# Altium PCB triumvi_v10_mcu.PcbDoc
Units mil, origin at the board's own origin, x right, y up, seen from the top; angles counter-clockwise.
Board outline 1100 x 1020 mil, 6 copper layers (Top Layer, GND, VCC, Signal Layer 2, GND (Mid4), Bottom Layer), stack 36 mil thick; 66 components, 63 nets, 311 pads, 142 vias.
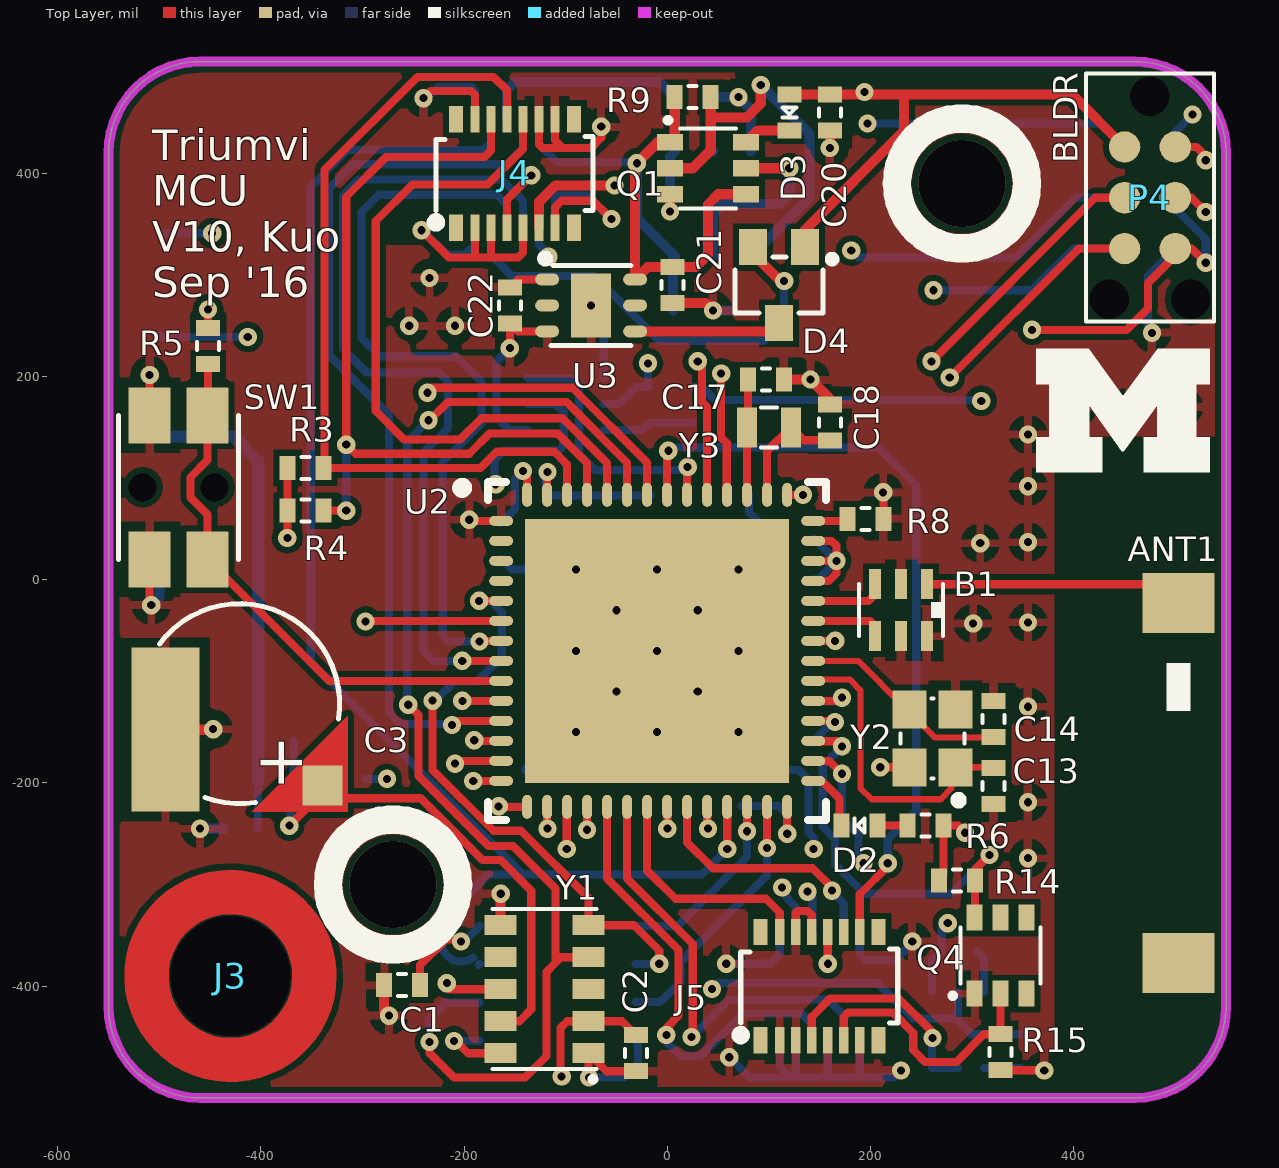
[diagram p0: Top Layer view]
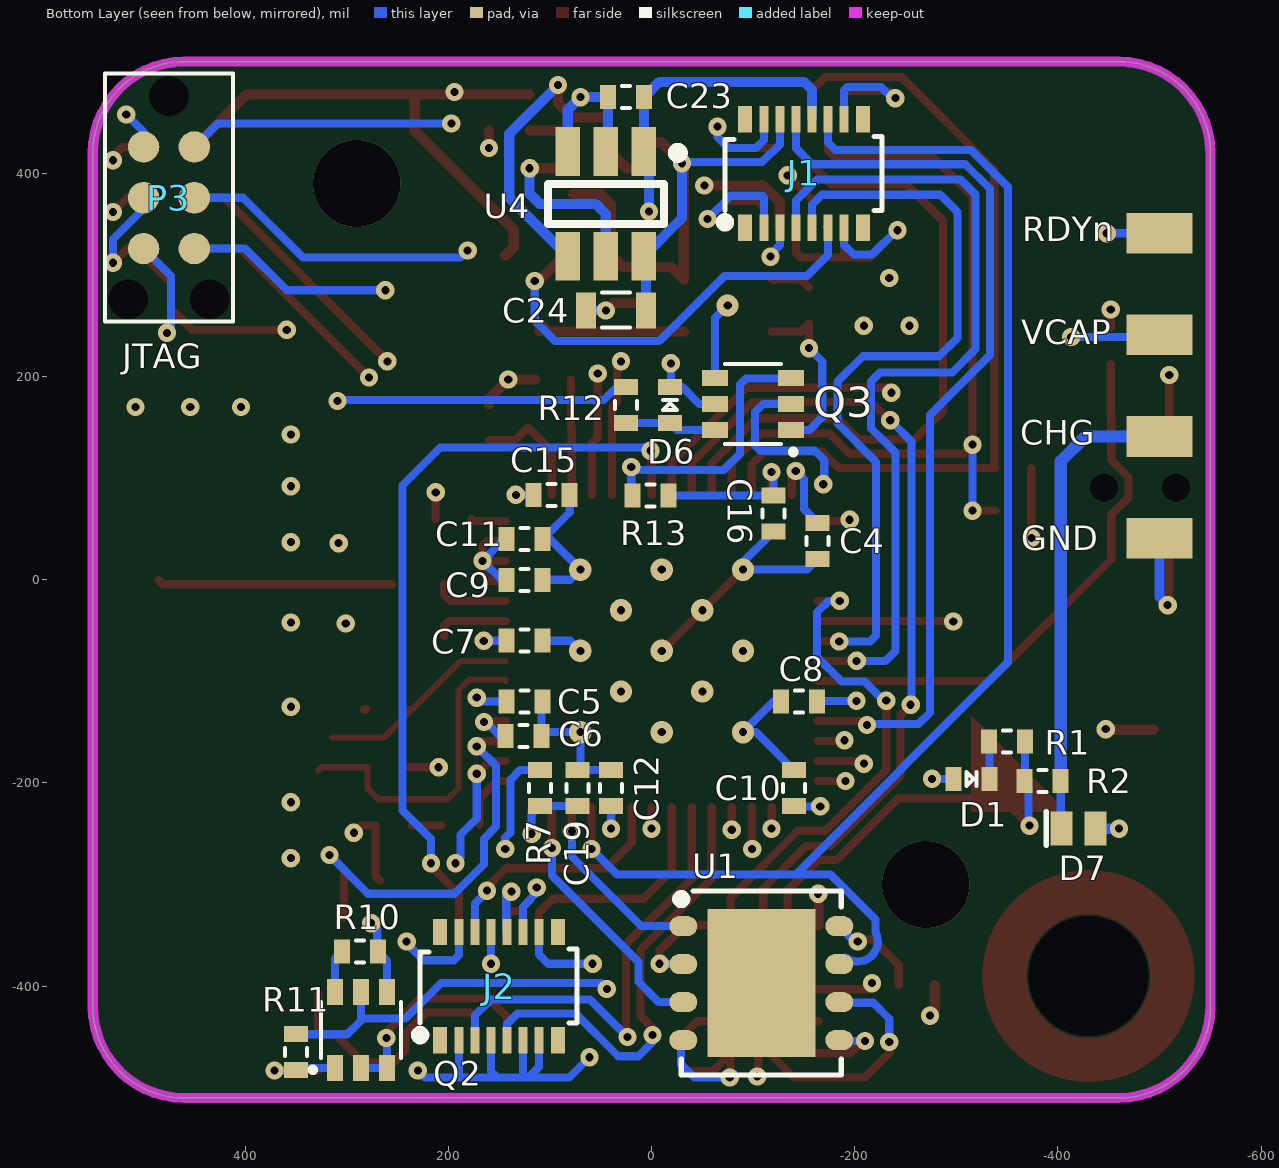
[diagram p1: Bottom Layer view, seen from below]
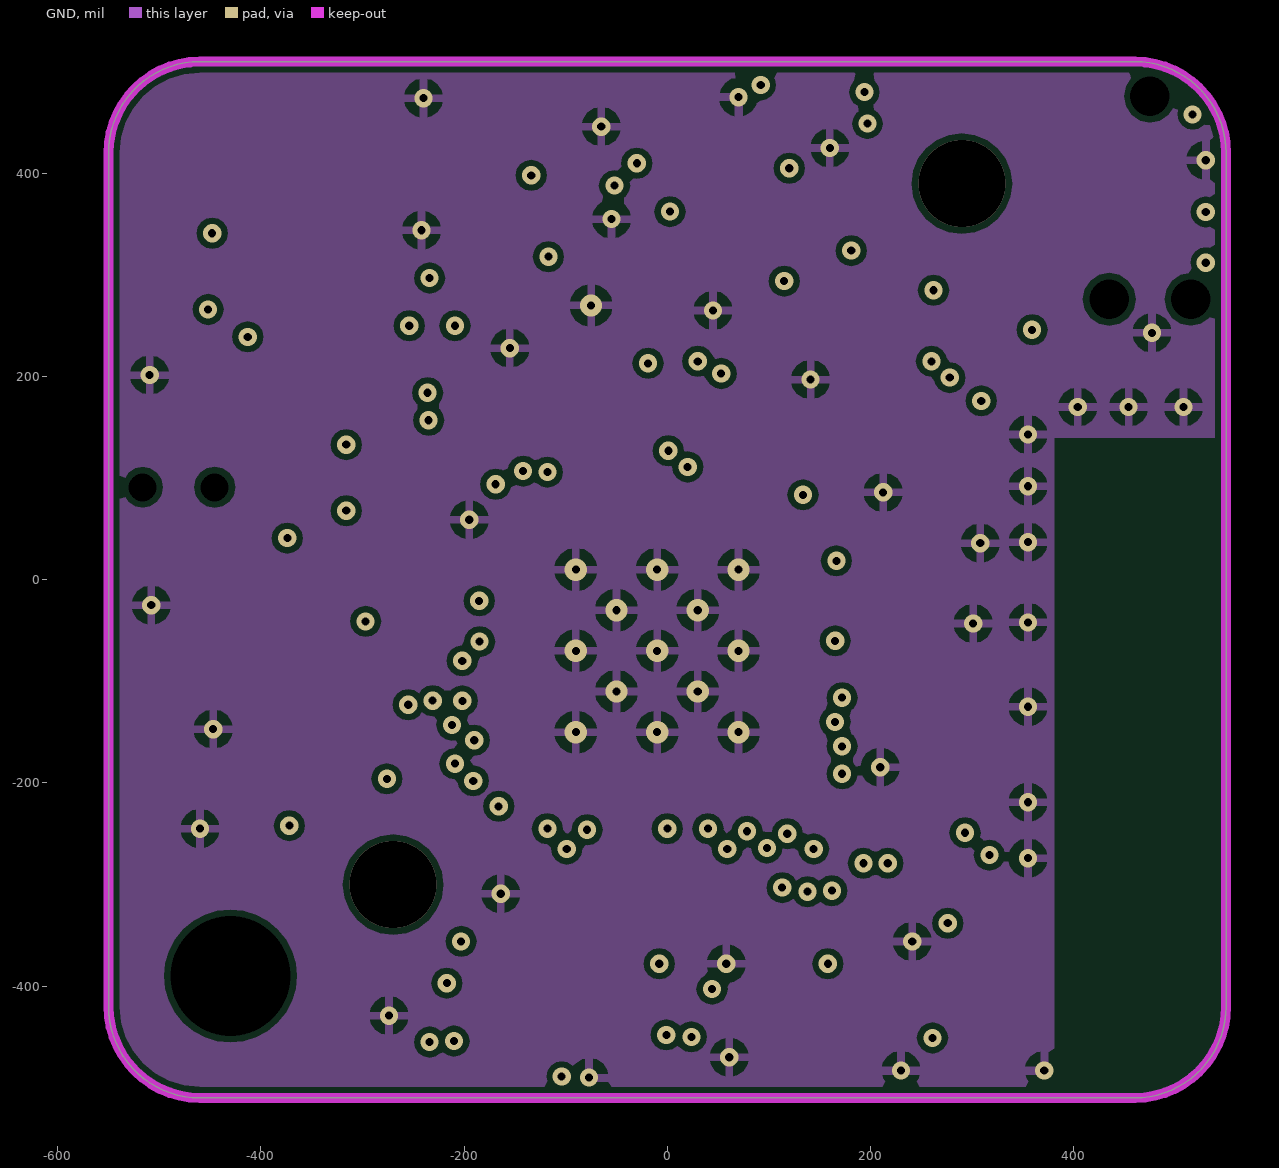
[diagram p2: GND]
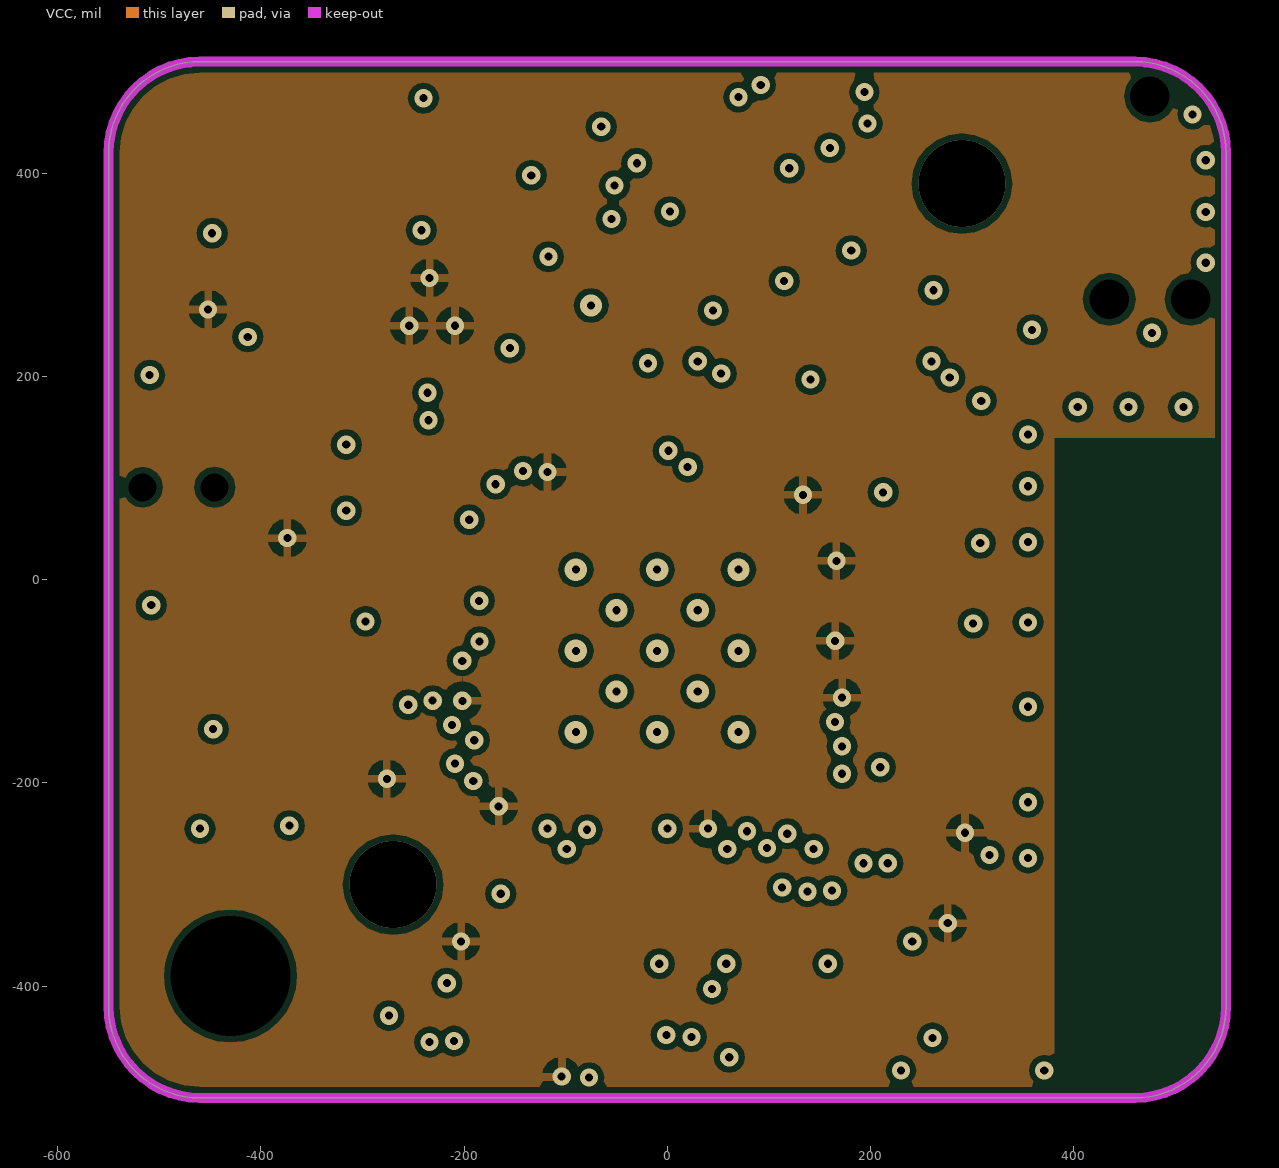
[diagram p3: VCC]
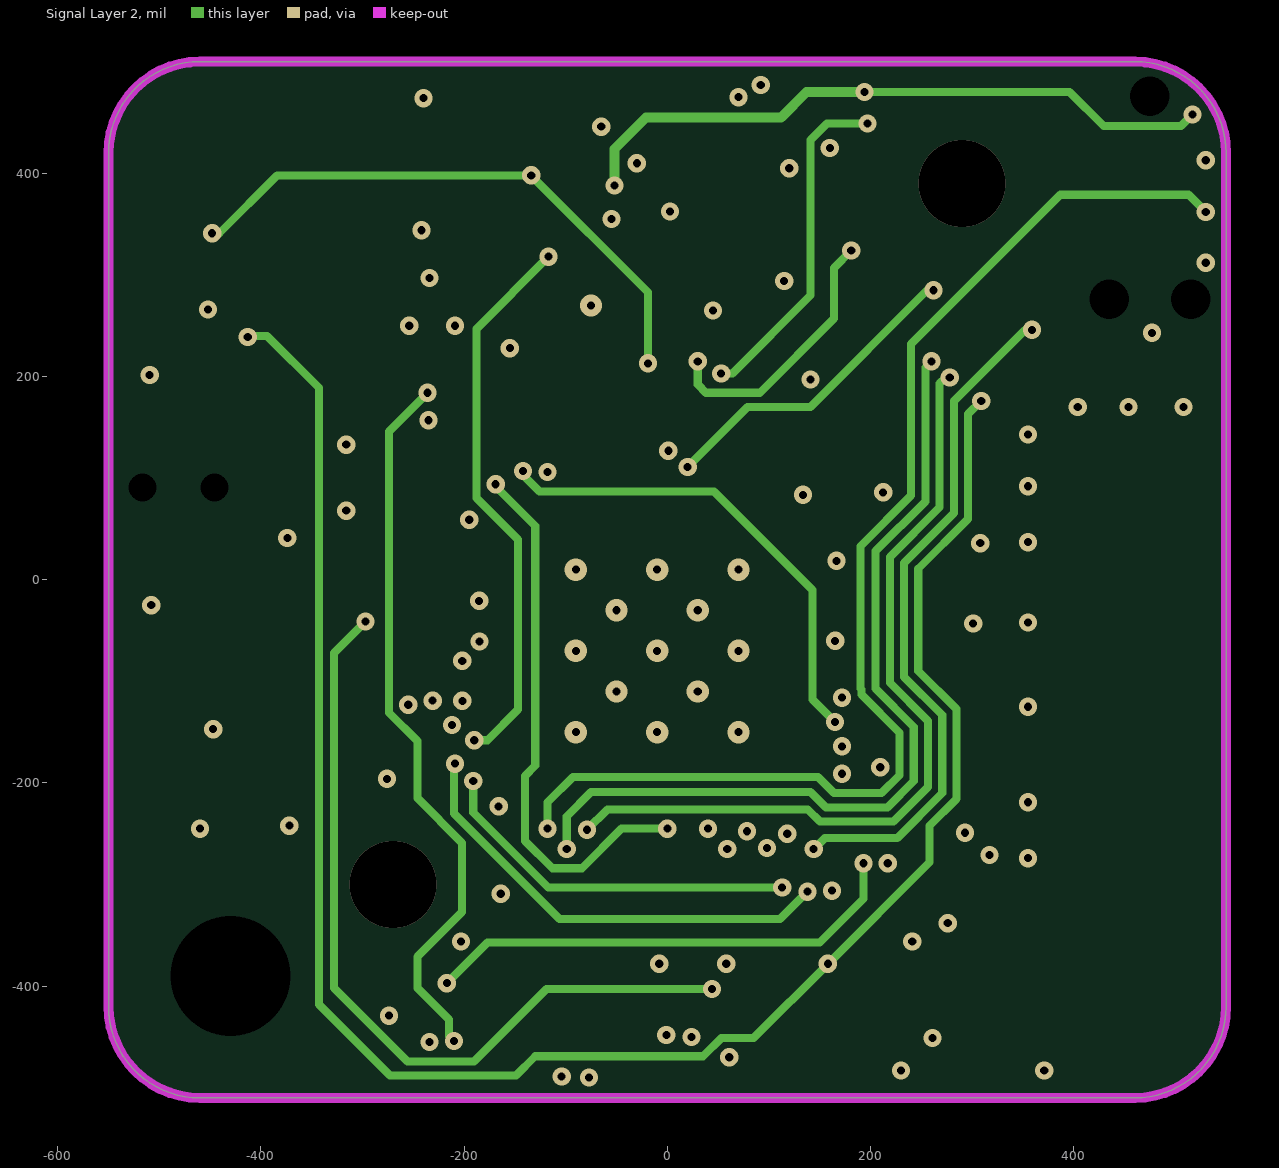
[diagram p4: Signal Layer 2]
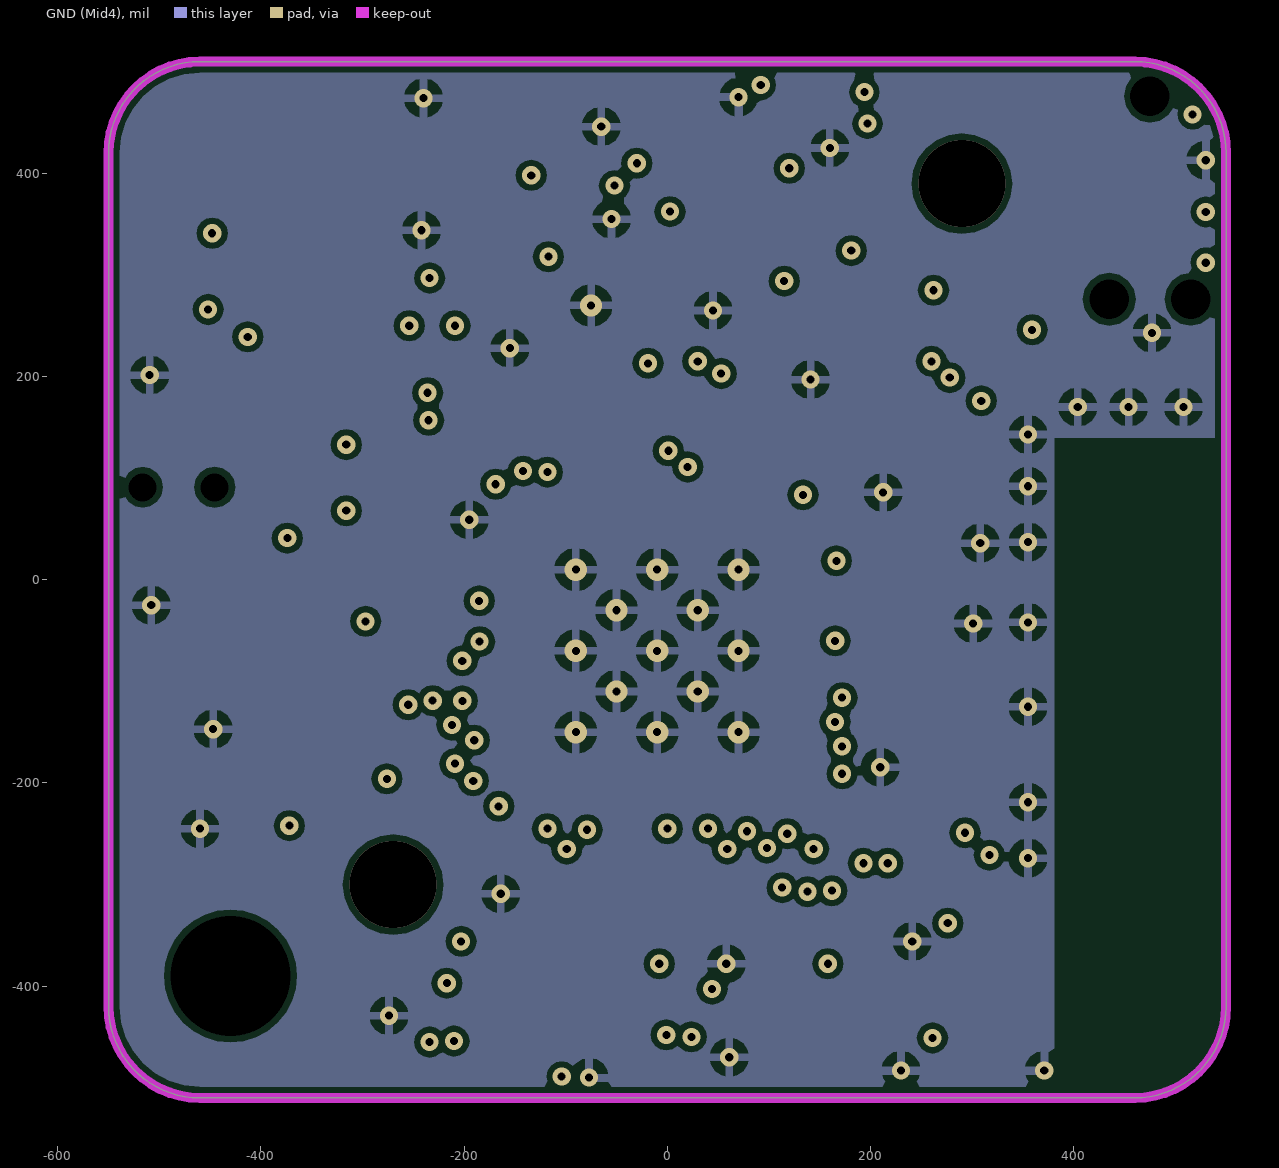
[diagram p5: GND (Mid4)]

## Layer stack, top to bottom
Top Solder: solder mask 0.4, Solder Resist, Dk 3.5
Top Layer: signal copper 2
Dielectric 1: prepreg 4, FR-4, Dk 4.2
GND: signal copper 1
Dielectric 3: core 8, Dk 4.2
VCC: signal copper 1
Dielectric 5: prepreg 4, Dk 4.2
Signal Layer 2: signal copper 1
Dielectric 2: core 8, Dk 4.2
GND (Mid4): signal copper 1
Dielectric 4: prepreg 4, Dk 4.2
Bottom Layer: signal copper 2
Bottom Solder: solder mask 0.4, Solder Resist, Dk 3.5

## Board outline
-550,-420 -550,420 cw(c-460,420) -460,510 460,510 cw(c460,420) 550,420 550,-420 cw(c460,-420) 460,-510 -460,-510 cw(c-460,-420)

## Design rules (kind name [scope] priority, off if disabled: settings)
Clearance "non plated holes" [InPadClass('NPHOLES')] p1: gap=10 // Sunstone Circuits Minimum Clearance Rule (MLB~4&6 Layer Designs)
Clearance "Clearance~Sunstone Circuits" [All] p2: gap=6 // Sunstone Circuits Minimum Clearance Rule (MLB~4&6 Layer Designs)
DiffPairsRouting [All] p1: maxlimit=10 minlimit=10 mostfreqgap=10 toplayer_minwidth=6 toplayer_maxwidth=15 toplayer_prefwidth=15 midlayer1_minwidth=6 midlayer1_maxwidth=15 midlayer1_prefwidth=15 midlayer2_minwidth=6 midlayer2_maxwidth=15 midlayer2_prefwidth=15 midlayer3_minwidth=15 midlayer3_maxwidth=15 midlayer3_prefwidth=15 midlayer4_minwidth=15 midlayer4_maxwidth=15 midlayer4_prefwidth=15 bottomlayer_minwidth=6 bottomlayer_maxwidth=15 bottomlayer_prefwidth=15 maxuncoupledlength=500
HoleSize "HoleSize~Sunstone Circuits" [All] p1: absolutevalues=TRUE maxlimit=251 minlimit=8 maxpercent=80.000 minpercent=20.000 // Sunstone Circuits Hole Size Rule (MLB~4&6 Layer Designs)
HoleSize Testpoint [All] p2: absolutevalues=TRUE maxlimit=100 minlimit=1 maxpercent=80.000 minpercent=20.000
HoleSize TestPointUsage [All] p3: absolutevalues=TRUE maxlimit=100 minlimit=1 maxpercent=80.000 minpercent=20.000
MinimumAnnularRing "MinimumAnnularRing~Sunstone Circuits" [All] p1 off: minimumring=7 // Sunstone Circuits Minimum Annular Ring (MLB~4&6 Layer Designs)
MinimumSolderMaskSliver [All] p1 off: minsoldermaskwidth=10
PlaneClearance "PlaneClearance~Sunstone Circuits" [All] p1: clearance=12 // Sunstone Circuits Power Plane Clearance Rule (MLB~4&6 Layer Designs)
PlaneConnect "PlaneConnect~Sunstone Circuits" [All] p1: planeconnectstyle=Relief reliefexpansion=10 reliefentries=4 reliefconductorwidth=8 reliefairgap=10 // Sunstone Circuits Power Plane Connect Rule (MLB~4&6 Layer Designs)
PolygonConnect "PolygonConnect~Sunstone Circuits" [All] p1: connectstyle=Relief reliefconductorwidth=8 reliefentries=4 polygonreliefangle="90 Angle" airgapwidth=10 // Sunstone Circuits Polygon Connect Style (MLB~4&6 Layer Designs)
RoomDefinition U_fram_rtc [InComponentClass('U_fram_rtc')] p1 off: confinementstyle=ConfineIn formatcopy=TRUE lockcomponents=FALSE outline -239.7,-341.48 -239.7,-256.52 195.63,-256.52 195.63,-154.88 320.81,-154.88 320.81,-340.52 325.7,-340.52 325.7,-496.48 -2.3,-496.48 -2.3,-508.48 -59.7,-508.48 -59.7,-506.79 -193.06,-506.79 -193.06,-500.05 -211.55,-500.05 -211.55,-341.48
RoomDefinition U_connectors [InComponentClass('U_connectors')] p2 off: confinementstyle=ConfineIn formatcopy=TRUE lockcomponents=FALSE outline -512.16,-62.44 -512.16,51.34 -470.48,51.34 -470.48,92.7 -432.5,92.7 -432.5,477.5 -239.27,477.5 -239.27,479.34 175.04,479.34 175.04,509.02 324.96,509.02 324.96,240.98 246.81,240.98 246.81,-479.34 60.73,-479.34 60.73,-474.9 -432.5,-474.9 -432.5,-91.7 -470.48,-91.7 -470.48,-62.44
RoomDefinition U_power_supply [InComponentClass('U_power_supply')] p3 off: confinementstyle=ConfineIn formatcopy=TRUE lockcomponents=FALSE outline -183.7,227.52 -183.7,312.48 -147.99,312.48 -147.99,342.99 -45.71,342.99 -45.71,458.59 -23.16,458.59 -23.16,467.44 -17.48,467.44 -17.48,503.7 67.48,503.7 67.48,502.48 188.7,502.48 188.7,417.52 179.37,417.52 179.37,221.88 -2.01,221.88 -2.01,197.01 -147.99,197.01 -147.99,227.52
RoomDefinition U_mcu [InComponentClass('U_mcu')] p4 off: confinementstyle=ConfineIn formatcopy=TRUE lockcomponents=FALSE outline -500.49,-115.36 -500.49,115.36 -497.48,115.36 -497.48,173.7 -357.7,173.7 -357.7,487.48 -259.3,487.48 -259.3,227.48 10.7,227.48 10.7,225.7 139.48,225.7 139.48,197.48 188.7,197.48 188.7,126.48 299.7,126.48 299.7,49.06 556.1,49.06 556.1,-250.46 296.48,-250.46 296.48,-270.7 211.52,-270.7 146.52,-270.7 146.52,-263.07 -221.77,-263.07 -221.77,-115.36
RoutingVias "RoutingVias~Sunstone Circuits" [All] p1: holewidth=16 width=30 viastyle="Through Hole" minholewidth=6 minwidth=18 maxholewidth=20 maxwidth=40 // Sunstone Circuits Routing Vias Rule (MLB~4&6 Layer Designs)
ShortCircuit "ShortCircuit~Sunstone Circuits" [All] p1: allowed=FALSE // Sunstone Circuits Short Circuit Rule~Do Not Allow (MLB~4&6 Layer Designs)
SilkToSilkClearance [All] p1 off: silktosilkclearance=10
SilkToSolderMaskClearance [IsPad] p1 off: minsilkscreentomaskgap=10 clearancetoexposedcopper=TRUE
SolderMaskExpansion TentVias [isVia] p1: expansion=-20 // Sunstone Circuits Solder Mask Expansion Rule (MLB~4&6 Layer Designs)
SolderMaskExpansion "SolderMaskExpansion~Sunstone Circuits" [All] p2: expansion=3 // Sunstone Circuits Solder Mask Expansion Rule (MLB~4&6 Layer Designs)
ViasUnderSMD "ViasUnderSMD~Sunstone Circuits" [All] p1: allowed=FALSE // Sunstone Circuits Vias Under SMD~Do Not Allow (MLB~4&6 Layer Designs)
Width "Width~Sunstone Circuits" [All] p1: maxlimit=100 minlimit=6 preferedwidth=10 // Sunstone Circuits Minimum Width Rule (MLB~4&6 Layer Designs)
22 further rules are at their usual default settings.

## Classes and differential pairs
component class U_power_supply: C20 C21 C22 C23 C24 D3 D4 Q1 R9 U3 U4
component class U_mcu: ANT1 B1 C4 C5 C6 C7 C8 C9 C10 C11 C12 C13 C14 C15 C16 C17 C18 C19 D2 D6 Q3 Q4 R3 R4 R5 R6 R7 R8 R12 R13 R14 R15 SW1 U2 Y2 Y3
component class U_fram_rtc: C1 C2 C3 D1 D7 R1 R2 U1 Y1
component class U_connectors: J1 J2 J3 J4 J5 P3 P4 Q2 R10 R11
differential pair CC2538_RF: +CC2538_RF_P -CC2538_RF_N

## Components (designator, comment, footprint, x,y, rotation, side; value= is the part's Value field where it differs from the comment)
ANT1 "2450AT45A100" 2450AT45A100 503,-200 r270 top
B1 "2450BM15A0002E" 2450BM15A0002 230,-30 r270 top
C1 "Ceramic capacitor" 0402 -261,-399 r180 top
C2 "Ceramic capacitor" 0402 -31,-466 r270 top
C3 "Electric Double Layer Capacitors" XH414HG-IV01E -421,-122 r270 top
C4 "Ceramic capacitor" 0402 -163.54,38.27 r270 bottom
C5 "Ceramic capacitor" 0402 125,-120 r180 bottom
C6 "Ceramic capacitor" 0402 126,-154 r180 bottom
C7 "Ceramic capacitor" 0402 125,-60 r180 bottom
C8 "Ceramic capacitor" 0402 -145,-120 r0 bottom
C9 "Ceramic capacitor" 0402 125,0 r180 bottom
C10 "Ceramic capacitor" 0402 -140,-205 r90 bottom
C11 "Ceramic capacitor" 0402 125,40 r180 bottom
C12 "Ceramic capacitor" 0402 40,-205 r90 bottom
C13 "Ceramic capacitor" 0402 321,-203 r90 top
C14 "Ceramic capacitor" 0402 321,-137 r270 top
C15 "Ceramic capacitor" 0402 98.27,83.54 r180 bottom
C16 "Ceramic capacitor" 0402 -120,65 r270 bottom
C17 "Ceramic capacitor" 0402 97,197 r0 top
C18 "Ceramic capacitor" 0402 160,155 r90 top
C19 "Ceramic capacitor" 0402 73,-205 r90 bottom
C20 "Ceramic capacitor" 0402 160,460 r270 top
C21 "Ceramic capacitor" 0402 5,290 r270 top
C22 "Ceramic capacitor" 0402 -155,270 r270 top
C23 "Ceramic capacitor" 0402 25,475 r0 bottom
C24 "Ceramic capacitor" 0603 35,265 r0 bottom
D1 "D_CDBQR0130L" "0402 - DIODE" -315,-196 r180 bottom
D2 "LED, Red" "0402 - DIODE" 189,-242 r180 top
D3 "D_CDBQR0130L" "0402 - DIODE" 120,460 r270 top
D4 "D_BAV70W" SOT323 110,290 r180 top
D6 "D_CDBQR0130L" "0402 - DIODE" -18,172 r90 bottom
D7 "D_CZRER52C3V6" 0503/SOD-723F -420,-245 r180 bottom
J1 "DF40C-12DP-0.4V" DF40C-12DP-0.4V -150,400 r180 bottom locked
J2 "DF40C-12DP-0.4V" DF40C-12DP-0.4V 150,-400 r180 bottom locked
J3 "9774020243R" 9774020243R -430,-390 r0 top
J4 "DF40C-12DP-0.4V" DF40C-12DP-0.4V -150,400 r0 top locked
J5 "DF40C-12DP-0.4V" DF40C-12DP-0.4V 150,-400 r0 top
P3 "TC2030" TC2030-IDC-NLFP 475,376 r270 bottom
P4 "TC2030" TC2030-IDC-NLFP 475,376 r270 top
Q1 "Si1965DH" SC70-6 40,405 r270 top
Q2 "Si1865DDL" SC70-6 286,-443 r180 bottom
Q3 "DMN2004DWK" SC70-6 -100,173 r90 bottom
Q4 "DMN2004DWK" SC70-6 328,-370 r0 top
R1 "Chip resistor" 0402 -350,-159 r180 bottom
R2 "Chip resistor" 0402 -385,-198 r0 bottom
R3 "Chip resistor" 0402 -356,110 r0 top
R4 "Chip resistor" 0402 -356,68 r0 top
R5 "Chip resistor" 0402 -452,230 r270 top
R6 "Chip resistor" 0402 254,-242 r0 top
R7 "Chip resistor" 0402 110,-205 r90 bottom
R8 "Chip resistor" 0402 195,60 r0 top
R9 "Chip resistor" 0402 25,475 r0 top
R10 "Chip resistor" 0402 287,-366 r0 bottom
R11 "Chip resistor" 0402 350,-465 r270 bottom
R12 "Chip resistor" 0402 25,172 r270 bottom
R13 "Chip resistor" 0402 1,83 r0 bottom
R14 "Chip resistor" 0402 285,-296 r0 top
R15 "Chip resistor" 0402 328,-465 r270 top
SW1 "EVQP7C" EVQP7C -481,91 r270 top
U1 "FM25V02A-DGTR" TDFN-8 -108,-397 r180 bottom
U2 "CC2538" QFN56 -10,-70 r0 top
U3 "ADP151_LFCSP" CP-6-3 -75,270 r0 top
U4 "LTC4412" TSOT-23 45,370 r270 bottom
Y1 "RV-3049-C3" RV-3049-C3 -121,-403 r90 top
Y2 "FA-128" FA-128 261,-156 r90 top
Y3 "ABS05" ABS05 100,150 r180 top

## Footprints (in the part's own frame and the unit in brackets; to place one, negate y for a bottom-side part, rotate by r counter-clockwise, add the part's x,y. Pads: shape width x height; smd on the part's side, far side on the other; paste and mask are expansions set on the pad)
0402 [mm] "2-Leads, Body 1.00x0.50mm, IPC Medium Density"
  rect 0.4x0.6 smd: 1(-0.45,0) 2(0.45,0)
  silkscreen extent -0.1,-0.28 0.1,0.28, body extent -0.53,-0.28 0.53,0.27, height 0.4
"0402 - DIODE" [mm] "2-Leads, Body 1.00x0.50mm, IPC Medium Density"
  rect 0.4x0.6 smd: 1(-0.45,0) 2(0.45,0)
  silkscreen extent -0.13,-0.18 0.13,0.18, body extent -0.53,-0.28 0.53,0.27, height 0.4
0503/SOD-723F [mm]
  rect 0.55x0.85 smd: 1(0.425,0) 2(-0.425,0)
  silkscreen extent -0.8,-0.43 -0.8,0.43, body extent -0.58,-0.33 0.58,0.33, height 0.6
0603 [mm] "2-Leads, Body 1.55x0.85mm, IPC Medium Density"
  rect 0.5x0.9 smd: 1(-0.75,0) 2(0.75,0)
  silkscreen extent -0.35,-0.45 0.35,0.43, body extent -0.75,-0.42 0.75,0.43, height 0.5
2450AT45A100 [mm] "Johnson Technology 2.4 GHz chip antenna"
  rect 1.5x1.8 smd: 1(-4.5,0) ""(4.5,0)
  silkscreen extent -3,-0.3 -1.8,0.3, body extent -4.8,-1 4.8,1, height 1.2
2450BM15A0002 [mm] "Chip Array, Flat, 6-Leads, Pitch 0.65mm,  Body 2.00x1.25mm,  IPC Medium Density"
  rect 0.75x0.3 smd: 1(-0.65,0.65) 2(-0.65,0) 3(-0.65,-0.65) 4(0.65,-0.65) 5(0.65,0) 6(0.65,0.65)
  silkscreen extent -0.65,-1.05 0.65,1.05, body extent -0.67,-1.05 0.67,1.05, height 0.81
9774020243R [mm] "m2 standoff, 2mm stack height"
  round 0 hole 3 unplated: ""(0,0)
  Top Layer region: 1.55,0 2.65,0 2.649,0.088 2.644,0.176 2.644,0.176 2.625,0.175 1.55,0.175 1.54,0.177 1.547,0.088 1.55,0
  Top Layer region: 2.65,0 2.302,-1.312 1.35,-2.28 0.044,-2.65 -1.274,-2.324 -2.257,-1.388 -2.649,-0.088 -2.345,1.235 -1.426,2.234 -0.132,2.647 1.196,2.365 2.21,1.462 2.644,0.176 2.644,0.176 2.625,0.175 1.55,0.175 1.54,0.177 1.254,0.911 0.644,1.41 -0.133,1.544 -0.875,1.279 -1.391,0.684 -1.547,-0.089 -1.304,-0.838 -0.723,-1.371 0.044,-1.549 0.8,-1.327 1.35,-0.762 1.55,0 1.55,0
  body extent -2.17,-2.17 2.18,2.17, height 2
ABS05 [mm] "ABS05 Crystal"
  rect 0.5x1 smd: 1(-0.55,0) 2(0.55,0)
  silkscreen extent -0.2,-0.5 0.2,0.5, body extent -0.8,-0.5 0.8,0.5, height 0.5
CP-6-3 [mm] "QFN, 6-Leads, Body 2.00x2.00mm, Pitch 0.65mm, Thermal Pad 1.00x1.55mm, IPC Medium Density"
  oval 0.6x0.3 smd: 1(-1.1,0.65) 2(-1.1,0) 3(-1.1,-0.65) 4(1.1,-0.65) 5(1.1,0) 6(1.1,0.65)
  rect 1x1.6 smd: 7(0,0)
  silkscreen extent -1.25,-1 1,1.27, body extent -1,-1 1,1, height 0.6
DF40C-12DP-0.4V [mm] "Hirose DF40 Series, 0.4mm pitch, 12 positions"
  rect 0.23x0.66 smd: 1(-1,-1.355) 2(-0.6,-1.355) 3(-0.2,-1.355) 4(0.2,-1.355) 5(0.6,-1.355) 6(1,-1.355) 7(1,1.355) 8(0.6,1.355) 9(0.2,1.355) 10(-0.2,1.355) 11(-0.6,1.355) 12(-1,1.355)
  rect 0.35x0.66 smd: ""(-1.475,-1.355) ""(-1.475,1.355) ""(1.475,-1.355) ""(1.475,1.355)
  silkscreen extent -2.08,-1.33 1.95,0.92, body extent -1.97,-1.49 1.95,1.48, height 1.09
EVQP7C [mm] "Panasonic EVQP7 tactile button"
  rect 1.4x1.05 smd: 1(-1.8,0.725) 1(1.8,0.725) 2(-1.8,-0.725) 2(1.8,-0.725)
  round 0 hole 0.7 unplated: ""(0,0.9) ""(0,-0.9)
  silkscreen extent -1.8,-1.5 1.8,1.5, body extent -1.8,-2.2 1.8,1.5, height 1.35
FA-128 [mm] "Seiko Epson FA-128 Crystal"
  rect 0.95x0.85 smd: 1(-0.725,-0.575) 2(0.725,-0.575) 3(0.725,0.575) 4(-0.725,0.575)
  silkscreen extent -1.63,-0.8 1,0.8, body extent -1,-0.8 1,0.8, height 0.5
QFN56 [mm] "QFN, 56-Leads, Body 8.00x8.00mm, Pitch 0.50mm, Thermal Pad 6.60x6.60mm, IPC Medium Density"
  oval 0.6x0.25 smd: 1(-3.9,3.25) 2(-3.9,2.75) 3(-3.9,2.25) 4(-3.9,1.75) 5(-3.9,1.25) 6(-3.9,0.75) 7(-3.9,0.25) 8(-3.9,-0.25) 9(-3.9,-0.75) 10(-3.9,-1.25) 11(-3.9,-1.75) 12(-3.9,-2.25) 13(-3.9,-2.75) 14(-3.9,-3.25) 29(3.9,-3.25) 30(3.9,-2.75) 31(3.9,-2.25) 32(3.9,-1.75) 33(3.9,-1.25) 34(3.9,-0.75) 35(3.9,-0.25) 36(3.9,0.25) 37(3.9,0.75) 38(3.9,1.25) 39(3.9,1.75) 40(3.9,2.25) 41(3.9,2.75) 42(3.9,3.25)
  oval 0.25x0.6 smd: 15(-3.25,-3.9) 16(-2.75,-3.9) 17(-2.25,-3.9) 18(-1.75,-3.9) 19(-1.25,-3.9) 20(-0.75,-3.9) 21(-0.25,-3.9) 22(0.25,-3.9) 23(0.75,-3.9) 24(1.25,-3.9) 25(1.75,-3.9) 26(2.25,-3.9) 27(2.75,-3.9) 28(3.25,-3.9) 43(3.25,3.9) 44(2.75,3.9) 45(2.25,3.9) 46(1.75,3.9) 47(1.25,3.9) 48(0.75,3.9) 49(0.25,3.9) 50(-0.25,3.9) 51(-0.75,3.9) 52(-1.25,3.9) 53(-1.75,3.9) 54(-2.25,3.9) 55(-2.75,3.9) 56(-3.25,3.9)
  rect 6.6x6.6 smd: 57(0,0)
  silkscreen extent -5,-4.22 4.22,4.23, body extent -4.08,-4.07 4.07,4.08, height 1
RV-3049-C3 [mm] "RV-3049-C3"
  rect 0.5x0.8 smd: 1(-1.6,-1.1) 2(-0.8,-1.1) 3(0,-1.1) 4(0.8,-1.1) 5(1.6,-1.1) 6(1.6,1.1) 7(0.8,1.1) 8(0,1.1) 9(-0.8,1.1) 10(-1.6,1.1)
  silkscreen extent -2.26,-1.3 2,1.3, body extent -1.9,-1.3 1.9,1.3, height 0.9
SC70-6 [mm]
  rect 0.406x0.648 smd: 1(-0.65,-0.95) 2(0,-0.95) 3(0.65,-0.95) 4(0.65,0.95) 5(0,0.95) 6(-0.65,0.95)
  silkscreen extent -1.2,-1 1,0.7, body extent -1,-0.7 1,0.7, height 1.1
SOT323 [mm] "SOT323"
  rect 0.7x0.9 smd: 1(-0.65,-0.95) 2(0.65,-0.95) 3(0,0.95)
  silkscreen extent -1.38,-0.71 1.1,0.7, body extent -1.1,-0.7 1.1,0.7, height 1
TC2030-IDC-NLFP [mil]
  round 31 smd paste-1181.1: 1(-50,-25) 2(-50,25) 3(0,-25) 4(0,25) 5(50,-25) 6(50,25)
  round 0 hole 39 unplated: ""(-100,0) ""(100,-40) ""(100,40)
  Top Layer pour cut-out: -50,25 -50,-25 50,-25 50,25
  silkscreen extent -122,-63 122,63
TDFN-8 [mm] "CYPRESS TDFN-8 (4 x 4.5 x 0.8 mm)"
  oval 0.7x0.5 smd: 1(-1.95,1.425) 2(-1.95,0.475) 3(-1.95,-0.475) 4(-1.95,-1.425) 5(1.95,-1.425) 6(1.95,-0.475) 7(1.95,0.475) 8(1.95,1.425)
  rect 2.7x3.7 smd: 9(0,0)
  silkscreen extent -2.1,-2.3 2,2.3, body extent -2,-2.3 2,2.3, height 0.8
TSOT-23 [mm] "SOT23, 6-Leads, Body 2.90x2.45mm, Pitch 0.95mm, IPC Medium Density"
  rect 1.22x0.62 smd: 1(-1.31,0.95) 2(-1.31,0) 3(-1.31,-0.95) 4(1.31,-0.95) 5(1.31,0) 6(1.31,0.95)
  silkscreen extent -1.4,-1.45 0.5,1.92, body extent -0.88,-1.45 0.87,1.45, height 1
XH414HG-IV01E [mm] "Seiko instruments XH414HG-IV01E"
  rect 1x1 smd: 1(2.05,2.075)
  rect 4.1x1.7 smd: 2(0.65,-1.85)
  Top Layer region: 2.7,0.3 2.7,2.7 0.3,2.7
  silkscreen extent -2.5,-2.01 2.5,2.5, body extent -2.4,-2.4 2.4,2.4, height 1.85

## Part data
ANT1: "2.45 GHz High Gain SMD Chip Antenna"
B1: "2.45 GHz Balun for TI CC253X"
C1 C2 C4 C5 C6 C7 C8 C9 C10 C12 C15 C16: library part C_0.1u_16V_0402_ceramic, "Ceramic capacitor, 0.1u, 16 V, 0402 package"
C3: library part C_80m_3.3V_supercap, "Electric double Layer Capacitors"
C11: library part C_220p_50V_0402_ceramic, "Ceramic capacitor, 220 pF, 0402 package"
C13 C14: library part C_12p_0402_ceramic, "Ceramic capacitor, 12 pF, 0402 package"
C17 C18: library part C_22p_0402_ceramic, "Ceramic capacitor, 22 pF, 0402 package"
C19: library part C_1000p_50V_0402_ceramic, "Ceramic capacitor, 1000 pF, 0402 package"
C20 C21 C22 C23: library part C_4.7u_6.3V_0402_ceramic, "Ceramic capacitor, 4.7 uF, 6.3V, 0402 package"
C24: library part C_10u_10V_0603_ceramic, "Ceramic capacitor, 10 uF, 10 V, 0603 package"
D1 D3 D6: "SMD Schottky Barrier Diode"
D2: library part D_LED_RED_0402, "LED, Red, 0402"
D4: "DUAL SURFACE MOUNT SWITCHING DIODE"
D7: "SURFACE MOUNT ZENER DIODE"
J1 J2 J4 J5: "Hirose BM20 Series, 0.4mm pitch, 12 pos, header"
J3: "2 mm stack height, m2 standoff"
P3 P4: "TC2030-MCP-NL"
Q1: "Dual P-Channel 12 V (D-S) MOSFET"
Q2: "Load Switch with Level-Shift"
Q3 Q4: "DUAL N-CHANNEL ENHANCEMENT MODE MOSFET"
R1: library part R_100K_0402, "Chip resistor, 100K, 0402 package"
R2 R3 R4: library part R_10K_0402, "Chip resistor, 10K, 0402 package"
R5 R10 R11 R13 R14 R15: library part R_1M_0402, "Chip resistor, 1M, 0402 package"
R6 R7: library part R_2.2K_0402, "Chip resistor, 2.2K, 0402 package"
R8: library part R_56K_0402_1%, "Chip resistor, 56K, 0402 package"
R9: library part R_470K_0402, "Chip resistor, 470K, 0402 package"
R12: library part R_47K_0402, "Chip resistor, 47K, 0402 package"
SW1: "3.5 mm⊙2.9 mm Side-operational SMD  Light Touch Switches"
U1: "256-Kbit (32 K ⊙ 8) Serial (SPI) F-RAM"
U2: "A Powerful System-On-Chip for 2.4-GHz IEEE 802.15.4, 6LoWPAN  and ZigBee Applications"
U3: "Ultralow Noise, 200 mA,  CMOS Linear Regulator"
U4: "Low Loss PowerPath Controller in ThinSOT"
Y1: "Real Time Clock Module with SPI-Bus"
Y2: "MHz Range Crystal Unit"
Y3: "32768 Hz SMD Low profile crystal"

## Free pads (board coordinates)
  rect 65x40 smd far side: ""(-500,41) ""(-500,141) ""(-500,241) ""(-500,341)

## Via types
v1: diameter 18, hole 8, Top Layer to Bottom Layer, 126 vias
v2: diameter 22, hole 8, Top Layer to Bottom Layer, 13 vias
v3: diameter 86, hole 86, Top Layer to Bottom Layer, 2 vias
v4: diameter 21.65, hole 8, Top Layer to Bottom Layer, 1 vias

## Nets (pads, with @x,y where several pads share a name; then routed paths per layer and width w, separated by ;. In a path a pad name is that pad's centre, name@x,y a point inside that pad or via, vN(x,y) a via of type N, cw(c..) or ccw(c..) an arc to the next point about the centre after c; other vN are vias at no path point)
BATT_PACK_DETECT: J4.9 U2.52 | length 688.5
  Top Layer w8: J4.9 -142.13,423.87 -177,389 -251,389 -287,353 -287,166 -259,138 -204,138 -183,159 -103.2,159 -59.21,115.01 U2.52
BATT_PACK_PWR: J5.3 Q2.2 Q2.3 | length 224.4
  Top Layer w8: J5.3 142.13,-430.17 160.3,-412 227.8,-412 261,-445.2 v1(261,-451)
  Bottom Layer w8: v1(261,-451) 260.41,-451.59 Q2.3 Q2.2
BLD_CTRL: P4.5 U2.18 | length 1055.3
  Top Layer w8: v1(-79,-246) -78.9,-245.9 U2.18 ; v1(278,199) 405,326 P4.5
  Signal Layer 2 w8: v1(-79,-246) -59,-226 138.2,-226 150.2,-238 222.55,-238 256.54,-204.01 256.54,-138.95 219,-101.4 219,22.4 268,71.4 268,193 274,199 v1(278,199)
BLD_RX: P4.4 U2.16 | length 1274.2
  Top Layer w8: U2.16@-119,-224.28 U2.16 -118.27,-244.73 v1(-118,-245) ; P4.4 516,376 v1(530,362)
  Signal Layer 2 w8: v1(-118,-245) -118,-219 -93,-194 148.13,-194 164.13,-210 210.96,-210 228.54,-192.41 228.54,-150.54 191,-113 191,-108.13 190,-107.13 190,33 240,83 240,232 387,379 513,379 v1(530,362)
BLD_TX: P4.3 U2.17 | length 1155.5
  Top Layer w8: v1(-99,-265) -99,-223.96 U2.17 ; v1(260,215) 421,376 P4.3 P4.3@447,379
  Signal Layer 2 w8: v1(-99,-265) -99,-233 -75,-209 141,-209 156,-224 216.76,-224 242.54,-198.21 242.54,-144.74 205,-107.2 205,28.2 254,77.2 254,209 v1(260,215) v1@261,215
CC2538_RF_N: B1.3 U2.38 | length 73.5
  Top Layer w8: U2.38 198.03,-20.79 204.41,-14.41 B1.3
CC2538_RF_P: B1.4 U2.37 | length 73
  Top Layer w8: U2.37 199.29,-40.47 204.41,-45.59 B1.4
CURRENT_WAVEFORM: J2.4 U2.19 | length 452.2
  Top Layer w8: U2.19 -59.21,-293.99 11,-364.2 11,-429 -1,-441 v1(-1,-448)
  Bottom Layer w8: v1(-1,-448) -1,-455 13,-469 32.81,-469 74.81,-427 132,-427 142.13,-437.13 J2.4
EXT_VOLT_SEL: J5.7 U2.49 | length 767.2
  Top Layer w8: U2.49 -0.16,125.84 v1(1,127) ; J5.7 189.37,-309.5 217,-281.87 v1(217,-279)
  Bottom Layer w8: v1(1,127) 4,130 208,130 245,93 245,-227 217,-255 v1(217,-279)
EXT_VOLT_WAVE: J5.12 U2.21 | length 229.4
  Top Layer w8: U2.21 -19.84,-286.16 8,-314 97.13,-314 110.63,-327.5 J5.12
G1: Q1.5 U4.5 | length 192.5
  Top Layer w10: Q1.5 v1(120,405)
  Bottom Layer w10: U4.5 45,360 55,370 110,370 120,380 v1(120,405)
G2: Q1.2 R9.2 U4.4 | length 388.6
  Top Layer w10: Q1.2 25,405 42.72,422.72 42.72,455 ; R9.2 42.72,455 ; v1(91.97,486.97) 91.97,468.69 78.28,455 42.72,455
  Bottom Layer w10: U4.4@80,316.02 U4.4 140,376.02 140,438.94 v1(91.97,486.97)
GND: B1.2 B1.5 B1.6 C1.2 C2.2 C3.2 C4.2 C5.2 C6.2 C7.2 C8.2 C9.2 C10.2 C11.2 C12.2 C13.1 C14.1 C15.2 C16.2 C17.2 C18.2 C19.2 C20.2 C21.2 C22.2 C23.2 C24.2 D7.1 J1.1 J1.6 J1.7 J1.12 J2.1 J2.3 J2.5 J2.6 J2.7 J2.12 J4.1 J4.2 J4.4 J4.6 J4.7 J4.8 J4.12 J5.1 J5.2 J5.4 J5.6 J5.10 J5.11 P3.5 P4.2 pad.@-500,41 Q2.1 Q3.1 Q3.4 Q4.1 R8.2 R11.2 R15.2 SW1.2 U1.4 U2.1 U2.57 U3.3 U3.7 U4.2 U4.3 Y1.1 Y1.6 Y2.2 Y2.4 | length 3394
  Top Layer w8: SW1.2@-509.54,20.13 -509.54,-23.46 v1(-508,-25) ; SW1.2@-509.54,161.87 v1(-509.54,201.46) v1@-508,203 ; v1(-242,344) -215,317 -188,317 ; v1(-240,474) -233,481 -193,481 -189.37,477.37 J4.12 ; v1@-192,62 v1(-195,59) -193.95,57.95 U2.1 ; J4.1 -189.37,318.37 -188,317 ; J4.2 -173.62,317.38 -174,317 ; v1@-164.31,-309.31 v1(-164,-309) ; v1(-155,228) C22.2 -147.13,244.41 U3.3 ; J4.4 -142.13,321.87 -147,317 -174,317 ; J4.8 -126.38,428.38 -123,425 -103,425 ; J4.6 -110.63,366.37 -104,373 -73,373 v1(-55,355) ; J4.7 -110.63,432.63 -103,425 ; v2(-90,10) v2(-50,-30) v2(-10,-70) ; v1(-77,-490) -77.69,-489.31 Y1.1 -59.97,-483.72 C2.2 ; v1(-65,446) -65,435 -75,425 -103,425 ; J5.11 126.38,-328.38 126,-328 128,-326 138,-326 142.13,-330.13 J5.10 ; J5.6@189,-453.72 J5.6 ; v1(209.54,-184.54) Y2.4 ; v1(212.43,86) 212.72,85.72 R8.2 ; Y2.2@281,-127.46 Y2.2 ; R15.2 370.72,-482.72 v1(371,-483) ; P4.2 520.87,426 530,416.87 v1(530,412.87) ; -188,317 -174,317
  Top Layer w10: C3.2 -447.59,-147.59 v1(-447,-147) ; C1.2 -278.72,-423.72 v1@-273.72,-428.72 ; Y1.6 v1@-164.31,-309.31 ; C21.2 37.72,272.28 v1(45,265) ; C17.2 v1(141,197) 160,178 C18.2 ; v1(160,425) C20.2
  Bottom Layer w8: v1(-242,344) -241,344 -217,320 -199,320 -189.37,329.63 J1.6 ; v1(-240,474) -237,474 -226,485 -192.74,485 -189.37,481.63 J1.7 ; C4.2 -152.99,10 v2(-90,10) -90,17.28 C16.2 ; v1(-155,228) -168,215 -168,160 -155.41,147.41 Q3.1 ; C10.2 -102.72,-150 v2(-90,-150) -120,-120 C8.2 ; J1.1 -110.63,376.37 -109,378 -78,378 v1(-55,355) ; J1.12 -110.63,432.63 -103,425 -76,425 -65,436 v1(-65,446) ; v1(-77,-490) -42,-490 -29,-477 -29,-455.33 U1.4 ; v4(-75,270) -62.6,257.6 Q3.4 ; C12.2 C19.2 70,-184.28 v2(70,-150) 104.28,-150 C6.2 108.28,-121 C5.2 ; v1(58,-378) 101.63,-378 110.63,-369 J2.7 ; v1(61,-470) 81,-490 121,-490 ; v2(70,-70) 80,-60 C7.2 ; C15.2 80.55,66.45 C11.2@107,40 ; C9.2 80,0 v2(70,10) 100,40 C11.2@107,40 ; C11.2 C11.2@107,40 ; J2.6 110.63,-479.63 121,-490 ; J2.5 126.38,-489.62 126,-490 ; J2.3 157.87,-484.13 152,-490 ; J2.1 189.37,-485.37 194,-490 ; J2.12 189.37,-369.37 194.45,-374.45 224.55,-374.45 229.55,-369.45 241,-358 v1(241,-356) ; v1(230,-483) 223,-490 194,-490 ; Q2.1 347.69,-480.4 R11.2 370.72,-482.72 v1(371,-483) ; v1(477,243) 473,247 473,299 P3.5 ; 121,-490 126,-490 ; 126,-490 152,-490 ; 152,-490 194,-490
  Bottom Layer w10: v1(-508,-25) -500,-17 pad.@-500,41 ; v1(-460,-245) D7.1 ; v1(45,265) C24.2 ; U4.2 42.72,423.86 C23.2 v1(70,475) 82.4,462.6 U4.3
  other v1: -274,-429 355,-274 355,-219 355,-125 301,-43 355,-42 308,36 355,37 355,92 355,143 404,170 454,170 508,170
  other v2: -10,-150 -50,-110 30,-110 -90,-70 30,-30 -10,10
I2C_SCL: J4.11 R4.2 U2.53 | length 815.9
  Top Layer w8: R4.2 v1(-316,68) ; J4.11 -173.62,422.38 -180,416 -277,416 -316,377 v1(-316,133) -307,124 -195,124 -175,144 -108,144 -78.9,114.9 U2.53
  Bottom Layer w8: v1(-316,68) v1(-316,133)
I2C_SDA: J4.10 R3.2 U2.54 | length 826.5
  Top Layer w8: R3.2 -337.28,111 R3.2@-337.28,112 ; J4.10 -157.87,481.87 -171,495 -245.87,495 -337.28,403.59 R3.2@-337.28,112 ; U2.54 -98.58,113.45 -111.13,126 -168,126 -184,110 -335.28,110 R3.2@-337.28,112
LDO_EN: D4.3 U3.4 | length 152.7
  Top Layer w10: U3.4 101.81,244.41 D4.3 D4.3@110,245
NetANT1_1: ANT1.1 B1.1 | length 231.2
  Top Layer w8.46: ANT1.1@480.98,-4.41 ANT1.1@485.08,-0.31
  Top Layer w8.61: B1.1 ANT1.1@480.98,-4.41
NetC3_1: C3.1 R1.2 R2.2 Y1.9 | length 538.1
  Top Layer w8: v1(-372,-242) -339.31,-209.31 C3.1 -327.02,-215 -243,-215 -182,-276 -164,-276 -134,-306 -134,-423 -145.5,-434.5 Y1.9
  Bottom Layer w8: v1(-372,-242) -371,-241 -371,-201.72 R2.2 -367.72,-197.57 R1.2
NetC4_1: C4.1 C6.1 U2.32 U2.56 | length 612.4
  Top Layer w8: v1(-142,107) -137.95,102.95 U2.56 ; U2.32 163.9,-138.9 v1(165,-140)
  Signal Layer 2 w8: v1(-142,107) -142,103.13 -125.87,87 46,87 143,-10 143,-118 v1(165,-140)
  Bottom Layer w8: C4.1 -150,69.53 -150,99 v1(-142,107) ; C6.1@142.72,-160 162.72,-140 v1(165,-140)
NetC13_2: C13.2 U2.34 Y2.1 | length 314.3
  Top Layer w6: U2.34 143.54,-98 179.46,-98 190,-108.54 190,-205 201,-216 269,-216 279.64,-205.36 Y2.1@279.64,-184.54 ; Y2.1 324.83,-184.54 C13.2@328.28,-188
NetC14_2: C14.2 U2.35 Y2.3 | length 198.8
  Top Layer w6: U2.35 187.75,-79.84 Y2.3@234.36,-126.46 ; Y2.3 238.36,-130.34 263.18,-155.16 C14.2@313.84,-155.16
NetC17_1: C17.1 U2.45 Y3.2 | length 113.9
  Top Layer w8: U2.45 78.58,149.76 Y3.2 79.28,150.94 C17.1
NetC18_1: C18.1 U2.44 Y3.1 | length 119.8
  Top Layer w8: U2.44 98.27,126.61 Y3.1 134.37,137.28 C18.1
NetC19_1: C19.1 R7.1 U2.28 | length 94.1
  Top Layer w8: U2.28 v1(118,-250) v1(118,-250)
  Bottom Layer w8: C19.1 R7.1 118,-230.72 v1(118,-250)
NetD1_2: D1.2 R1.1 | length 37.2
  Bottom Layer w8: D1.2 -332.72,-159.43 R1.1
NetD2_1: D2.1 R6.1 | length 29.6
  Top Layer w8: D2.1 R6.1
NetD3_2: D3.2 Q1.6 | length 47.4
  Top Layer w10: Q1.6 89.09,442.28 D3.2
NetJ1_2: J1.2 U2.12 | length 607
  Top Layer w8: v1(-190,-158) -189.42,-158.58 U2.12
  Signal Layer 2 w8: v1(-190,-158) -177.13,-158 -147,-127.87 -147,39.44 -188,80.44 -188,247 v1(-117,318)
  Bottom Layer w8: J1.2 -126.38,329.38 -117,320 v1(-117,318)
NetJ1_3: J1.3 U2.8 | length 841.9
  Top Layer w8: v1(-201.84,-79.84) U2.8
  Bottom Layer w8: v1(-201.84,-79.84) -230.16,-79.84 -240,-70 -240,125.13 -216,149.13 -216,195 -225,204 -296,204 -319,227 -319,379 -304,394 -163,394 -142.13,373.13 J1.3
NetJ1_4: J1.4 U2.7 | length 762.5
  Top Layer w8: v1(-184.77,-60.84) v1@-184.09,-60.16 ; v1@-184,-60.07 v1@-184.09,-60.16 ; U2.7 v1@-184.09,-60.16
  Bottom Layer w8: v1(-184.77,-60.84) -215.16,-60.84 -221,-55 -221,116 -183,154 -183,195 -208,220 -283,220 -301,238 -301,362 -284,379 -167.8,379 -157.87,369.08 J1.4
NetJ1_8: J1.8 U1.7 U2.25 | length 1398.6
  Top Layer w8: U2.25 59,-223.65 v1(59,-265)
  Bottom Layer w8: U1.7@-191.05,-371.69 cw(c-203,-356) -220.52,-346.94 -220.52,-334.52 -176,-290 -142,-290 ; U1.7@-185.47,-379 U1.7 ; J1.8@-174,452.97 J1.8 -173.62,430.38 -174,430 -181,423 -314.6,423 -351,386.6 -351,-81 -142,-290 ; v1(59,-265) 34,-290 -142,-290
NetJ1_10: J1.10 U2.11 | length 893.2
  Top Layer w8: v1(-212,-142.94) -208.06,-139 -163.65,-139 U2.11
  Bottom Layer w8: v1(-212,-142.94) -212.94,-142 -262.87,-142 -274,-130.87 -274,162.2 -333,221.2 -333,384.8 -308.8,409 -158,409 -142.13,424.87 J1.10
NetJ2_8: J2.8 U2.14 | length 442.4
  Top Layer w8: v1(-191,-198) v1(-191,-198) U2.14
  Signal Layer 2 w8: v1(-191,-198) -191,-229.2 -117.2,-303 v1(113,-303)
  Bottom Layer w8: v1(113,-303) 113,-308 119,-314 119,-314.87 126.38,-322.25 J2.8
NetJ2_9: J2.9 U2.13 | length 540.4
  Top Layer w8: v1(-209,-181) -206.27,-178.27 U2.13
  Signal Layer 2 w8: v1(-209,-181) -210,-182 -210,-230 -106,-334 111,-334 v1(138,-307)
  Bottom Layer w8: v1(138,-307) 143,-312 143,-345.78 J2.9
NetJ2_11: J2.11 U2.23 | length 244.5
  Top Layer w8: U2.23 19.53,-258.53 45,-284 143,-284 v1@163.5,-304.5
  Bottom Layer w8: v1@161,-306 v1(162,-306) 162,-307 173.62,-318.62 J2.11
NetQ2_5: Q2.5 R11.1 U2.6 | length 1296.4
  Top Layer w8: v1(-297,-41) -296.47,-40.47 U2.6
  Signal Layer 2 w8: v1(-297,-41) -328,-72 -328,-401.87 -255.87,-474 -190.13,-474 -118.96,-402.83 v1(44,-402.83)
  Bottom Layer w8: v1(44,-402.83) 49.83,-397 207,-397 242,-432 284,-432 286,-434 ; Q2.5 286,-434 ; R11.1 299.28,-447.28 286,-434
NetQ2_6: Q2.6 R10.2 | length 42.4
  Bottom Layer w8: R10.2 311.59,-372.87 Q2.6
NetQ3_2: Q3.2 U2.22 | length 731.1
  Top Layer w8: U2.22 0,-223.7 v1(0,-245)
  Signal Layer 2 w8: v1(-169,94) -170,93 -130,53 -130,-183 -140.1,-193.1 -140.1,-257.1 -113.2,-284 -84,-284 -45,-245 v1(0,-245)
  Bottom Layer w8: v1(-169,94) -170,95 -170,118 -161,127 -107,127 -102,132 -102,165 -110,173 Q3.2
NetQ4_6: Q4.6 R14.2 U2.31 | length 407.2
  Top Layer w8: U2.31 143.54,-159 167,-159 v1(172,-164) ; Q4.6 302.72,-332.29 R14.2 302.72,-285.28 v1(317,-271)
  Bottom Layer w8: v1(172,-164) 153,-183 153,-243 165,-255 165,-280 194,-309 279,-309 v1(317,-271)
NetR5_2: R5.2 SW1.1 U2.9 | length 544.8
  Top Layer w8: R5.2 -452,162.32 -452.46,161.87 -452.46,117.74 -469.35,100.85 -469.35,81.15 -452.46,64.26 -452.46,20.13 -332.8,-99.53 U2.9
NetR8_1: R8.1 U2.42 | length 34.6
  Top Layer w8: U2.42 175.24,57.95 R8.1
NetU1_1: U1.1 U2.26 | length 188.7
  Top Layer w8: v1(78.42,-247.58) 78.58,-247.58 U2.26
  Bottom Layer w8: U1.1@-30.13,-342 U1.1 10.1,-340.9 78.42,-272.58 v1(78.42,-247.58)
NetU1_3: U1.3 U2.27 | length 260
  Top Layer w8: v1(98,-264) 98.27,-263.73 U2.27
  Bottom Layer w8: U1.3 -7,-415.7 13,-395.7 13,-376.13 98,-291.13 v1(98,-264)
NetU2_30: U2.30 Y1.8 | length 677.1
  Top Layer w8: v1@-220,-397 -214,-403 v1@-211,-403 ; v1(-217,-397) v1@-211,-403 ; Y1.8 v1@-211,-403 ; U2.30 159.4,-178.27 171.13,-190 172,-190 v1(172,-191)
  Signal Layer 2 w8: v1(-217,-397) -177,-357 150,-357 193,-314 v1(193,-279)
  Bottom Layer w8: v1(172,-191) 172,-235 188,-251 188,-274 v1(193,-279)
PD3: D2.2 U2.29 | length 58.7
  Top Layer w8: U2.29 152.08,-197.95 169.28,-215.15 D2.2@169.28,-241
PGOOD: D4.2 J1.5 | length 447.3
  Top Layer w10: D4.2 84.41,320.59 111,294 v1(115,294)
  Bottom Layer w8: J1.5@-173,347.28 J1.5 -173.62,319.62 -153,299 -71.64,299 -7.64,235 95,235 115,255 v1(115,294)
R\D\Y\_\I\N\: D6.2 J4.3 pad.@-500,341 Q3.5 | length 758.7
  Top Layer w8: J4.3 -157.87,374.13 v1(-134,398)
  Signal Layer 2 w8: v1(-448,341) -441,341 -384,398 v1(-134,398) -19,283 v1(-19,213)
  Bottom Layer w8: pad.@-500,341 v1(-448,341) ; Q3.5 -47,173 -30.28,189.72 D6.2 -19,190.72 v1(-19,213)
R\E\A\D\Y\: D6.1 Q3.6 R12.2 | length 90.4
  Bottom Layer w8: Q3.6 -24.87,147.41 D6.1 R12.2
R\E\S\E\T\: P3.3 P4.6 R7.2 | length 1085.3
  Top Layer w8: v1(359,246) 452,246 473,267 473,292 500,319 P4.6 516,326 v1(530,312)
  Signal Layer 2 w8: v1(144,-265) 155,-254 226.35,-254 270.54,-209.81 270.54,-133.15 233,-95.6 233,16.6 282,65.6 282,176.13 351.87,246 v1(359,246)
  Bottom Layer w8: R7.2 129.28,-187.28 139,-197 139,-248.8 144,-253.8 v1(144,-265) ; P3.3 500,365.13 530,335.13 v1(530,312)
SPI_CLK: U1.6 U2.51 Y1.4 | length 1231.7
  Top Layer w8: v1(-255,-123) -245,-133 -245,-193 -176,-262 -152,-262 -110,-304 -110,-377 ; v1(-235,157) -235,156 -216,175 -99.4,175 -39.53,115.13 U2.51 ; v1(-234,-455) -234,-465.87 -209.87,-490 -140,-490 -119,-469 -119,-386 -110,-377 ; Y1.4 -104.5,-371.5 -110,-377
  Bottom Layer w8: v1@-256,-123 -256,136 v1(-235,157) ; v1(-234,-455) -234,-432.13 -218.3,-416.43 -218.3,-416.3 -184.77,-416.3 U1.6
SPI_MISO: U1.2 U2.5 Y1.5 | length 595.3
  Top Layer w8: v1(-231,-119) -231,-187.2 -171.2,-247 -143.87,-247 -77.69,-313.18 Y1.5 -32.99,-340.01 -8,-365 v1(-8,-378) ; v1(-185.21,-20.79) U2.5
  Bottom Layer w8: v1(-231,-119) -228.44,-119 -209.66,-100.21 -187.21,-100.21 -163,-76 -163,-32 -174.21,-20.79 v1(-185.21,-20.79) ; U1.2 -8.3,-378.3 v1(-8,-378)
SPI_MOSI: U1.5 U2.50 Y1.10 | length 1067.4
  Top Layer w8: v1@-232,189 -93.6,189 -19.84,115.24 U2.50 ; v1(-210,-454) -208,-454 -196.01,-465.99 Y1.10
  Signal Layer 2 w8: v1(-236,184) -274,146 -274,-130.87 -246,-158.87 -246,-215 -202,-259 -202,-327 -246,-371 -246,-402 -215,-433 -215,-449 v1(-210,-454)
  Bottom Layer w8: v1(-210,-454) -185.67,-454 U1.5
TCK: P3.4 U2.47 | length 696.2
  Top Layer w8: v1(30,215) 34,211 34,175 39,170 39,83.76 U2.47
  Signal Layer 2 w8: v1(30,215) 30,192 38,184 91,184 164,257 164,307 v1(181,324)
  Bottom Layer w8: v1(181,324) 188,317 343,317 402,376 P3.4
TDO: P3.6 Q3.3 R13.2 U2.48 | length 811.2
  Top Layer w8: U2.48 19.53,110.53 v1(20,111)
  Signal Layer 2 w8: v1(20,111) 79,170 140.87,170 255.87,285 v1(262,285)
  Bottom Layer w8: Q3.3 -136.81,198 -93,198 -87,192 -87,124 -71,108 17,108 v1(20,111) 20,84.28 R13.2 ; v1(262,285) 359,285 400,326 P3.6
TMS: P3.2 U2.46 | length 719.9
  Top Layer w8: v1(53,203) 53,140 58.5,134.5 58.5,83.94 U2.46
  Signal Layer 2 w8: v1(53,203) 64,203 141,280 141,432.87 157.13,449 v1(197,449)
  Bottom Layer w8: v1(197,449) 427,449 P3.2
V_CHARGE: D7.2 pad.@-500,141 R2.1 | length 469.3
  Bottom Layer w8: D7.2 -402.72,-244.45 R2.1
  Bottom Layer w12: pad.@-500,141 -427,141 -402.72,116.72 R2.1
V_EXTERNAL: C20.1 D3.1 D4.1 J4.5 P3.1 P4.1 | length 1343
  Top Layer w10: J4.5 -126.16,346.65 -126.16,372.06 -110.21,388 v1(-52,388) ; D3.1 C20.1 v1@194,477.72 ; D4.1@144,318.99 D4.1 135.59,344.59 233,442 233,477.72 ; v1@197.28,477.72 233,477.72 ; P4.1 398.28,477.72 233,477.72
  Signal Layer 2 w8: v1(194,480) 396,480 429.5,446.5 505.5,446.5 v1(517,458)
  Signal Layer 2 w10: v1(-52,388) -52,424 -21,455 112,455 137,480 v1(194,480)
  Bottom Layer w8: P3.1 500,441 v1(517,458)
V_HARVEST: C23.1 J1.9 Q1.3 U4.1 | length 331.5
  Top Layer w10: Q1.3 v1(2.6,362.4) v1@5,360
  Bottom Layer w10: J1.9 -157.87,482.13 -150,490 -7.72,490 C23.1 7.28,421.89 U4.1 ; v1(2.6,362.4) U4.1@2.6,416.57
V_SELECTED: C21.1 C24.1 J1.11 Q1.1 Q1.4 R9.1 U3.6 U4.6 | length 664.9
  Top Layer w10: v1@-31.69,410 U3.6 -19.57,307.72 C21.1 27.72,307.72 40,320 40,369.41 50,379.41 Q1.4 ; v1(-30,410) -9.41,430.59 Q1.1 7.28,435.28 R9.1
  Bottom Layer w8: J1.11 -126.38,428.58 -108.8,411 -31,411 v1(-30,410)
  Bottom Layer w10: v1(-30,410) -30,356.02 U4.6 5.47,316.3 C24.1
VCAP: J2.10 J5.9 pad.@-500,241 R12.1 | length 2383.9
  Top Layer w8: 157.87,-368.87 J5.9 158,-346.78 v1(158,-378)
  Signal Layer 2 w8: v1(-413,239) -412,240 -394,240 -343,189 -343,-418 -273,-488 -149,-488 -130,-469 35.13,-469 53.13,-451 85,-451 v1(158,-378) 258,-278 258,-242.15 284.54,-215.61 284.54,-127.35 247,-89.8 247,10.8 296,59.8 296,163 v1(309,176)
  Bottom Layer w8: pad.@-500,241 -498,239 v1(-413,239) ; R12.1 34.28,189.72 47,177 v1@309,177 ; J2.10 157.87,-377.87 v1(158,-378)
VCAP_LOOPBACK: J5.5 Q4.2 R15.1 | length 260.4
  Top Layer w8: J5.5 173.62,-430.38 178,-426 222,-426 242,-446 242,-463 253.5,-474.5 284.5,-474.5 311.72,-447.28 R15.1 Q4.2
VCC_MCU: C1.1 C2.1 C5.1 C7.1 C8.1 C9.1 C10.1 C11.1 C12.1 C15.1 C16.1 C22.1 D1.1 Q2.4 R3.1 R4.1 R5.1 R6.2 R10.1 R13.1 R14.1 U1.8 U2.10 U2.15 U2.24 U2.33 U2.36 U2.39 U2.40 U2.41 U2.43 U2.55 U3.1 Y1.2 | length 1162.9
  Top Layer w8: R5.1 v1(-452,266) ; v1(-374,41) -373.72,41.28 R4.1 R3.1 ; C1.1 -243.28,-379.28 -218,-354 -205,-354 v1(-203,-356) ; v1(-201.79,-119.21) U2.10 ; v1(-166,-223) -165.46,-223.54 U2.15 ; C22.1 -147.13,295.59 U3.1 ; U2.55 -118.27,105.73 v1(-118,106) ; v1(-104,-489) -105,-489 -105,-441 -98.5,-434.5 Y1.2 -44.79,-434.5 C2.1 ; U2.24 39.21,-244.21 v1(40,-245) ; U2.43 v1(133.54,83.54) ; U2.33 170.79,-119.21 172,-118 v1(172,-116) ; U2.36 v1(165.16,-60.16) ; U2.39 158.9,-1.1 166.42,6.42 v1(166.42,18.58) ; U2.40 v1(166.42,18.58) ; U2.41 161.73,38.27 166.42,33.58 v1(166.42,18.58) ; R14.1 271.72,-291.57 R6.2 286,-242 v1(293,-249) 294,-249 v1@295,-248
  Bottom Layer w8: D1.1 v1(-276,-196) ; v1(-203,-356) -199.87,-356 U1.8 ; v1(-201.79,-119.21) -163.5,-119.21 C8.1 ; v1(-166,-223) -140.28,-223 C10.1 ; v1(-118,106) -120,104 C16.1 -119.72,83 R13.1 ; C12.1@39.72,-223 C12.1 v1(40,-245) ; C15.1 v1(133.54,83.54) ; C5.1 168,-120 v1(172,-116) ; C7.1 165,-60 v1(165.16,-60.16) ; C9.1 147.83,0 v1(166.42,18.58) 145,40 C11.1 ; Q2.4 260.41,-374.87 R10.1 270,-365.28 270,-344 v1(276,-338)
  other v1: -254,250 -209,250 -234,297
VREF_BUF: J2.2 U2.20 | length 450.2
  Top Layer w8: U2.20 -39.53,-293.87 25,-358.4 25,-448.7 v1(23.7,-450)
  Bottom Layer w8: v1(23.7,-450) 60.7,-413 158,-413 173.62,-428.62 J2.2
pads on no net: ANT1. J1. J2. J3. J4. J5. J5.8 P3. P4. Q4.3 Q4.4 Q4.5 SW1. U1.9 U2.2 U2.3 U2.4 U3.2 U3.5 Y1.3 Y1.7
copper on no net:
  other v3: -270,-300 290,390

## Polygon pours and split planes (outlines as drawn)
VCC_MCU on Top Layer "Top Layer-No Net" (solid, pour order 0): -289,329 -289,227 -170,227 -170,268 -170,270 -135,270 -134,270 -134,329
GND on Top Layer "Top Layer-No Net" (solid, remove dead copper, pour order 14): 381,-509.67 381,141 550,141 550,510 420,510 -550,510 -550,-505.77
GND on GND "Top Layer-No Net" (solid, pour order 2): -550,-420 -550,420 cw(c-460,420) -460,510 460,510 cw(c460,420) 550,420 550,-420 cw(c460,-420) 460,-510 -460,-510 cw(c-460,-420)
GND on GND (Mid4) "Top Layer-No Net" (solid, pour order 10): -550,-419 -550,421 cw(c-460,421) -460,511 460,511 cw(c460,421) 550,421 550,-419 cw(c460,-419) 460,-509 -460,-509 cw(c-460,-419)
VCC_MCU on VCC "Top Layer-No Net" (solid, pour order 12): -550,-420 -550,420 cw(c-460,420) -460,510 460,510 cw(c460,420) 550,420 550,-420 cw(c460,-420) 460,-510 -460,-510 cw(c-460,-420)

## Keep-outs
Keep-Out Layer:
  the board outline again, w10

## Other copper
GND:
  pour cut-out: 381,140 381,-520 559,-520 559,140
VCC:
  pour cut-out: 381,140 381,-520 559,-520 559,140
GND (Mid4):
  pour cut-out: 381,140 381,-520 559,-520 559,140

## Silkscreen, mask and mechanical layers (free items; w line width, h text height)
Top Overlay:
  circle w28: c-270,-300 r64
  circle w28: c290,390 r64
  region: 363.3,105.66 428.26,105.66 428.26,140.34 415.05,140.34 415.05,171.72 447.25,126.58 449.46,126.58 482.21,171.72 482.21,140.34 469,140.34 469,105.66 533.96,105.66 533.96,140.34 520.75,140.34 520.75,192.64 533.96,192.64 533.96,227.32 482.49,227.32 449.46,181.63 447.81,181.63 414.77,227.32 363.3,227.32 363.3,192.64 375.96,192.64 375.96,140.34 363.3,140.34
  text "BLDR" at 404,410 h24 r90
  text "Triumvi / MCU / V10, Kuo / Sep '16" at -507,278 h30
Bottom Overlay:
  text "RDYn" at -365,333 h24
  text "VCAP" at -364,232 h24
  text "JTAG" at 521,208 h24
  text "CHG" at -363,133 h24
  text "GND" at -364,29 h24
Mechanical 14:
  lines w10: -560,-420 ccw(c-460,-420) -460,-520 460,-520 ccw(c460,-420) 560,-420 ; -560,420 cw(c-460,420) -460,520 460,520 cw(c460,420) 560,420
Mechanical 16:
  lines w10: -560,-610 -560,610 ; 560,-610 560,610

## Text inside footprints (layer, text, board x,y; h text height)
C3: Top Overlay "+" at -400.33,-152.51 h48 r270